# Altium PCB MSM8916_board.PcbDoc (part 2 of 2)
Units mil, origin at the board's own origin, x right, y up, seen from the top; angles counter-clockwise.
Board outline 1181.46 x 1183.49 mil, 2 copper layers (Top Layer, Bottom Layer); 218 components, 226 nets, 1647 pads, 0 vias.
Unrouted connection lines stored in the file: 1143.
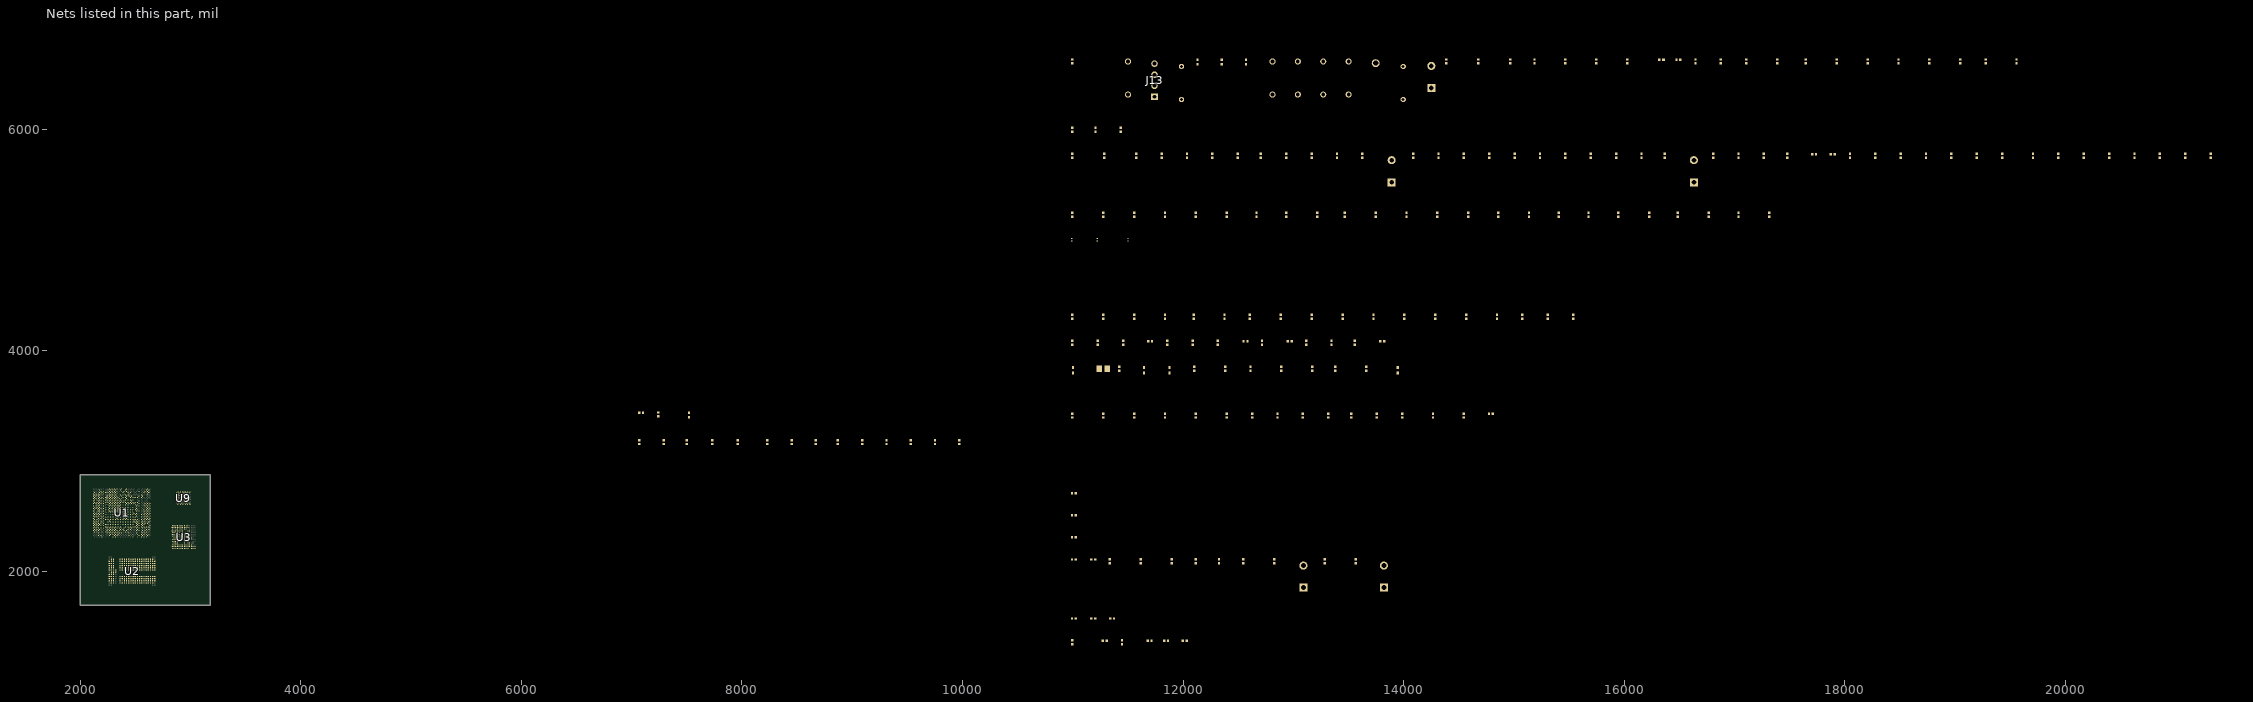
[diagram p2: the nets of this part, all layers, seen from the top]

## Part data
C1 C64: library part CAP, Tolerance="10% 6.3V", VOLT=?V, CDS_LMAN_SYM_OUTLINE=-75,25,75,-25, OriginalSymbolOrigin=(-100,75), PACK_TYPE=?, PART_ID=MFG_NO, PART_NUMBER=MCN_NO, SYMNAME=CAP
C2 C173: library part CAP, Tolerance=5%, VOLT=50V, CDS_LMAN_SYM_OUTLINE=-75,25,75,-25, OriginalSymbolOrigin=(-100,75), PACK_TYPE=?, PART_ID=MFG_NO, PART_NUMBER=MCN_NO, SYMNAME=CAP
C3: "Capacitor", LatestRevisionDate=17-Jul-2002, LatestRevisionNote="Re-released for DXP Platform.", PackageDescription="Radial Cap, Thru-Hole; 2 Leads; 0.3 in Pin Spacing", PackageReference=RAD-0.3, Published=8-Jun-2000, Publisher="Altium Limited"
C4 C5 C10 C11 C12 C13 C14 C15 C16 C17 C19 C20 C21 C22 C119: library part CAP#1, Tolerance="10% 6.3V", VOLT=?V, CDS_LMAN_SYM_OUTLINE=-25,50,25,-50, OriginalSymbolOrigin=(-75,50), PACK_TYPE=?, PART_ID=MFG_NO, PART_NUMBER=MCN_NO, SYMNAME=CAP
C7 C9 C23 C24 C25 C26 C27 C28 C29 C30 C31 C32 C33 C34 C35 C36 C37 C38 C39 C40 C41 C42 C43 C44 C45 C46 C47 C48 C49 C50 C51 C52 C53 C54 C55 C56 C57 C58 C59 C60 C61 C70 C120 C124 C145 C175 C179 C180 C181 C182 C183 C184 C185 C186 C187 C188 C189 C190 C197 C202 C210 C228 C229: library part Cap, "Capacitor", LatestRevisionDate=17-Jul-2002, LatestRevisionNote="Re-released for DXP Platform.", PackageDescription="Radial Cap, Thru-Hole; 2 Leads; 0.3 in Pin Spacing", PackageReference=RAD-0.3, Published=8-Jun-2000, Publisher="Altium Limited"
C18: library part CAP#1, Tolerance="6.3V 10%", VOLT=?V, CDS_LMAN_SYM_OUTLINE=-25,50,25,-50, OriginalSymbolOrigin=(-75,50), PACK_TYPE=?, PART_ID=MFG_NO, PART_NUMBER=MCN_NO, SYMNAME=CAP
C65: library part CAP, Tolerance=10%, VOLT=6.3V, CDS_LMAN_SYM_OUTLINE=-75,25,75,-25, OriginalSymbolOrigin=(-100,75), PACK_TYPE=?, PART_ID=MFG_NO, PART_NUMBER=MCN_NO, SYMNAME=CAP
C66: library part CAP, Tolerance=6.3V, VOLT=10%, CDS_LMAN_SYM_OUTLINE=-75,25,75,-25, OriginalSymbolOrigin=(-100,75), PACK_TYPE=?, PART_ID=MFG_NO, PART_NUMBER=MCN_NO, SYMNAME=CAP
C67: library part CAP#1, Tolerance=6.3V, VOLT=10%, CDS_LMAN_SYM_OUTLINE=-25,50,25,-50, OriginalSymbolOrigin=(-75,50), PACK_TYPE=?, PART_ID=MFG_NO, PART_NUMBER=MCN_NO, SYMNAME=CAP
C69 C71: library part CAP, Tolerance="20% 6.3V", VOLT=?V, CDS_LMAN_SYM_OUTLINE=-75,25,75,-25, OriginalSymbolOrigin=(-100,75), PACK_TYPE=?, PART_ID=MFG_NO, PART_NUMBER=MCN_NO, SYMNAME=CAP
C76 C77 C78 C79 C146 C147 C148 C149 C150 C151 C152 C153 C154 C155: library part CAP#1, Tolerance="20% 6.3V", VOLT=?V, CDS_LMAN_SYM_OUTLINE=-25,50,25,-50, OriginalSymbolOrigin=(-75,50), PACK_TYPE=?, PART_ID=MFG_NO, PART_NUMBER=MCN_NO, SYMNAME=CAP
C80: library part CAP, Tolerance=50V, VOLT=5%, CDS_LMAN_SYM_OUTLINE=-75,25,75,-25, OriginalSymbolOrigin=(-100,75), PACK_TYPE=?, PART_ID=MFG_NO, PART_NUMBER=MCN_NO, SYMNAME=CAP
C81: library part CAP#1, Tolerance=20%, VOLT=10V, CDS_LMAN_SYM_OUTLINE=-25,50,25,-50, OriginalSymbolOrigin=(-75,50), PACK_TYPE=?, PART_ID=MFG_NO, PART_NUMBER=MCN_NO, SYMNAME=CAP
C82: library part CAP, Tolerance=10%, VOLT=10V, CDS_LMAN_SYM_OUTLINE=-75,25,75,-25, OriginalSymbolOrigin=(-100,75), PACK_TYPE=?, PART_ID=MFG_NO, PART_NUMBER=MCN_NO, SYMNAME=CAP
C83 C84 C85 C86 C92 C93 C94 C95 C156 C157 C158 C159: library part CAP#1, Tolerance="10% 10V", VOLT=?V, CDS_LMAN_SYM_OUTLINE=-25,50,25,-50, OriginalSymbolOrigin=(-75,50), PACK_TYPE=?, PART_ID=MFG_NO, PART_NUMBER=MCN_NO, SYMNAME=CAP
C89: library part CAP#1, Tolerance=10%, VOLT=10V, CDS_LMAN_SYM_OUTLINE=-25,50,25,-50, OriginalSymbolOrigin=(-75,50), PACK_TYPE=?, PART_ID=MFG_NO, PART_NUMBER=MCN_NO, SYMNAME=CAP
C90 C91: library part CAP#1, Tolerance="20% 3.6V", VOLT=?V, CDS_LMAN_SYM_OUTLINE=-25,50,25,-50, OriginalSymbolOrigin=(-75,50), PACK_TYPE=?, PART_ID=MFG_NO, PART_NUMBER=MCN_NO, SYMNAME=CAP
C102 C104 C107 C113 C127 C128: library part C0201
C103 C105 C106 C108 C109 C110 C111 C112 C114 C115 C116 C117 C129 C130 C131 C132 C133 C134: library part C0402
CR24: library part SCHOTTKY, CDS_LMAN_SYM_OUTLINE=-50,75,50,-75, OriginalSymbolOrigin=(-100,100), PACK_TYPE=?, PART_ID=MFG_NO, PART_NUMBER=MCN_NO, SYMNAME=SCHOTTKY
D1: "发光二极管", LatestRevisionDate=08-Jul-2005, LatestRevisionNote="Mech Layer 1 removed.", PackageReference=LED-0, Published=8-Jun-2000, Publisher="Altium Limited"
E5 L12 L16 L17 L18: library part Inductor, "Inductor", Code_IEC=1005, Code_JEITA=0402, LatestRevisionDate=29-May-2009, LatestRevisionNote="IPC-7351 Footprint Added.", PackageDescription="Chip Inductor", PackageReference=0402-A, Published=8-Jun-2000, Publisher="Altium Limited"
E10: library part TP
J13: library part "Header 4", "Header, 4-Pin", LatestRevisionDate=17-Jul-2002, LatestRevisionNote="Re-released for DXP Platform.", Publisher="Altium Limited"
JP1 JP2 S6A S6B: "Switch", LatestRevisionDate=17-Jul-2002, LatestRevisionNote="Re-released for DXP Platform.", PackageDescription="Switch; 2 Leads", PackageReference=SPST-2, Published=24-Mar-1999, Publisher="Altium Limited"
L1 L2 L3 L4: library part INDUCTOR_0
R1 R2 R3 R6 R9 R16 R17 R18 R19 R20 R21 R25 R45 R48 R93 R94 R95 R96 R97 R105 R127 R128 R129 R132 R133 R134 R135 R137 R158 R166: library part Res1, "Resistor", LatestRevisionDate=17-Jul-2002, LatestRevisionNote="Re-released for DXP Platform.", PackageDescription="Axial Device, Thru-Hole; 2 Leads; 0.3 in Pin Spacing", PackageReference=AXIAL-0.3, Published=8-Jun-2000, Publisher="Altium Limited"
R4 R5 R7 R8 R28 R80: library part RESISTOR_Dup3, POWER=0.05W, Tolerance=1%, CDS_LMAN_SYM_OUTLINE=-150,50,150,-50, OriginalSymbolOrigin=(-200,50), PACK_TYPE=?, PART_ID=MFG_NO, PART_NUMBER=MCN_NO, SYMNAME=resistor
R10: "贴片电阻", LatestRevisionDate=17-Jul-2002, LatestRevisionNote="Re-released for DXP Platform.", PackageReference=AXIAL-0.4, Published=8-Jun-2000, Publisher="Altium Limited"
R43 R44 R163: library part R0201
R88 R106 R130 R138: library part RESISTOR_Dup3, POWER=0.063W, Tolerance=5%, CDS_LMAN_SYM_OUTLINE=-150,50,150,-50, OriginalSymbolOrigin=(-200,50), PACK_TYPE=?, PART_ID=MFG_NO, PART_NUMBER=MCN_NO, SYMNAME=resistor
R104: library part RESISTOR_Dup3, POWER="5% 0.05W", Tolerance=?%, CDS_LMAN_SYM_OUTLINE=-150,50,150,-50, OriginalSymbolOrigin=(-200,50), PACK_TYPE=?, PART_ID=MFG_NO, PART_NUMBER=MCN_NO, SYMNAME=resistor
S5: library part SW-SPST, "Single-Pole, Single-Throw Switch", LatestRevisionDate=17-Jul-2002, LatestRevisionNote="Re-released for DXP Platform.", PackageDescription="Switch; 2 Leads", PackageReference=SPST-2, Published=24-Mar-1999, Publisher="Altium Limited"
Y1: library part CRYSTAL_4PIN_THERMISTOR_GND, FREQ=19.2MHZ, CDS_LMAN_SYM_OUTLINE=-300,125,300,-500, OriginalSymbolOrigin=(-350,150), PACK_TYPE=?, PART_ID=MFG_NO, PART_NUMBER=MCN_NO, SYMNAME=crystal_4pin_thermistor_gnd
U1: CDS_LMAN_SPLIT_NUMBER="1 of 13", CDS_LMAN_SYM_OUTLINE=-1050,2500,1050,-2500, OriginalSymbolOrigin=(-1100,2500), PACK_TYPE=?, PART_ID=MFG_NO, PART_NUMBER=MCN_NO, SPLIT_INST=TRUE, SYMNAME=NC_DNC
U3: BLOCKID=PROTO, CDS_LMAN_SPLIT_NUMBER="1 of 7", CDS_LMAN_SYM_OUTLINE=-850,1125,875,-1250, OriginalSymbolOrigin=(-1050,1125), PACK_TYPE=?, PART_ID=MFG_NO, PART_NUMBER=MCN_NO, SPLIT_INST=TRUE, SYMNAME=GND
U9: CDS_LMAN_SPLIT_NUMBER="1 of 2", CDS_LMAN_SYM_OUTLINE=-850,1375,875,-1500, OriginalSymbolOrigin=(-1075,1375), PACK_TYPE=?, PART_ID=MFG_NO, PART_NUMBER=MCN_NO, SPLIT_INST=TRUE, SYMNAME=PWR_GND

## Nets (pads, with @x,y where several pads share a name; then routed paths per layer and width w, separated by ;. In a path a pad name is that pad's centre, name@x,y a point inside that pad or via, vN(x,y) a via of type N, cw(c..) or ccw(c..) an arc to the next point about the centre after c; other vN are vias at no path point)
APQ_BBCLK1_EN: U1.A36 U3.E4
APQ_PS_HOLD: R25.1 U1.E36
APQ_RESIN_N: R166.1 U1.F35
APQ_RESOUT_N: U1.AV1 U2.C2
BATT_ID: R129.1 R135.2 U3.G9
BATT_THERM: R134.2 R137.1
BBCLK1: U1.AD35 U1.AL34 U3.F2
BOOT_CONFIG_0: R18.2 U1.BD5
BOOT_CONFIG_1: R128.2 S6B.2 U1.BD7
BOOT_CONFIG_2: R17.2 U1.BC38
BOOT_CONFIG_3: R21.2 U1.BC40
BOOT_CONFIG_5: R132.2 U1.BD39
CBLPWR_N: R104.2 U3.L10
CLK_IN_19M2_PM: U3.J1
DGND: C1.2 C2.2 C3.1 C4.1 C5.1 C7.1 C9.1 C10.1 C11.1 C12.1 C13.1 C14.1 C15.1 C16.1 C17.1 C18.1 C19.1 C20.1 C21.1 C22.1 C23.1 C24.1 C25.1 C26.1 C27.1 C28.1 C29.1 C30.1 C31.1 C32.1 C33.1 C34.1 C35.1 C36.1 C37.1 C38.1 C39.1 C40.1 C41.1 C42.1 C43.1 C44.1 C45.1 C46.1 C47.1 C48.1 C49.1 C50.1 C51.1 C52.1 C53.1 C54.1 C55.1 C56.1 C57.1 C58.1 C59.1 C60.1 C61.1 C64.2 C65.2 C66.2 C67.1 C69.2 C70.1 C71.2 C76.1 C77.1 C78.1 C79.1 C80.2 C81.2 C82.2 C83.1 C84.1 C85.1 C86.1 C89.1 C90.1 C91.1 C92.1 C93.1 C94.1 C95.1 C119.1 C120.1 C124.1 C146.1 C147.1 C148.1 C149.1 C150.1 C151.1 C152.1 C153.1 C154.1 C155.1 C156.1 C157.1 C158.1 C159.1 C173.2 C179.1 C180.1 C181.1 C182.1 C183.1 C184.1 C185.1 C186.1 C187.1 C188.1 C190.1 C197.1 C202.1 C210.1 C228.1 C229.1 CR24.2 D1.2 J13.2 J13.3 J13.4 L16.1 L17.1 L18.1 R1.1 R5.2 R7.2 R43.1 R80.2 R104.1 R105.1 R106.1 R163.1 U1.A6 U1.A12 U1.A16 U1.A22 U1.A28 U1.A32 U1.AA4 U1.AA8 U1.AA24 U1.AA26 U1.AA28 U1.AA30 U1.AB13 U1.AB15 U1.AB17 U1.AB21 U1.AC4 U1.AC30 U1.AD7 U1.AD19 U1.AD21 U1.AE16 U1.AE20 U1.AF5 U1.AF9 U1.AF11 U1.AF13 U1.AF15 U1.AF17 U1.AF19 U1.AF21 U1.AF23 U1.AF25 U1.AF27 U1.AF29 U1.AG18 U1.AG20 U1.AH7 U1.AH9 U1.AH31 U1.AJ2 U1.AJ4 U1.AJ34 U1.AK7 U1.AK11 U1.AK13 U1.AK15 U1.AK17 U1.AK19 U1.AK21 U1.AK23 U1.AK29 U1.AK31 U1.AK33 U1.AL8 U1.AL30 U1.AM1 U1.AM3 U1.AM13 U1.AM15 U1.AM21 U1.AM23 U1.AM25 U1.AM29 U1.AM31 U1.AM33 U1.AN20 U1.AP9 U1.AR4 U1.AR6 U1.AR8 U1.AR22 U1.AR24 U1.AR26 U1.AT1 U1.AT3 U1.AT13 U1.AT23 U1.AT27 U1.AT29 U1.AU2 U1.AU6 U1.AU12 U1.AU22 U1.AU26 U1.AU28 U1.AU38 U1.AV5 U1.AV9 U1.AV11 U1.AV13 U1.AV15 U1.AV17 U1.AV19 U1.AV33 U1.AW2 U1.AW4 U1.AW10 U1.AW12 U1.AW14 U1.AW34 U1.AY11 U1.AY13 U1.AY15 U1.AY17 U1.AY19 U1.AY21 U1.AY23 U1.AY27 U1.B5 U1.BA8 U1.BA12 U1.BA14 U1.BA16 U1.BA18 U1.BA20 U1.BA22 U1.BA26 U1.BA28 U1.BB7 U1.BB9 U1.BB15 U1.BB17 U1.BB19 U1.BB21 U1.BB23 U1.BB25 U1.BB27 U1.BC12 U1.BC16 U1.BC18 U1.BC20 U1.BC22 U1.BC24 U1.BC26 U1.BC28 U1.BC36 U1.BD9 U1.BD13 U1.BD15 U1.BD17 U1.BD19 U1.BD21 U1.BD23 U1.BD25 U1.BD27 U1.BD37 U1.BE8 U1.BE10 U1.BE14 U1.BE16 U1.BE18 U1.BE20 U1.BE22 U1.BE24 U1.BE26 U1.BE28 U1.C8 U1.C18 U1.C20 U1.C32 U1.D5 U1.D7 U1.D27 U1.E12 U1.F7 U1.F19 U1.F21 U1.F25 U1.F27 U1.F29 U1.F37 U1.G8 U1.G10 U1.G12 U1.G14 U1.G16 U1.G18 U1.G20 U1.G24 U1.G28 U1.G30 U1.G32 U1.H35 U1.H37 U1.J16 U1.J18 U1.J32 U1.J36 U1.J38 U1.K5 U1.K9 U1.K17 U1.K21 U1.K37 U1.L4 U1.L6 U1.L8 U1.L30 U1.L32 U1.M5 U1.M7 U1.M35 U1.M37 U1.M39 U1.N2 U1.N4 U1.N8 U1.N22 U1.N24 U1.N26 U1.N28 U1.N30 U1.N32 U1.N34 U1.N36 U1.N38 U1.N40 U1.P5 U1.P9 U1.P11 U1.P13 U1.P15 U1.P17 U1.P21 U1.P35 U1.P37 U1.P39 U1.R8 U1.R22 U1.R24 U1.R26 U1.R28 U1.R30 U1.R32 U1.R34 U1.R36 U1.R38 U1.R40 U1.T3 U1.T5 U1.T17 U1.T19 U1.T35 U1.T37 U1.T39 U1.U26 U1.U28 U1.U30 U1.U32 U1.U34 U1.U36 U1.U38 U1.U40 U1.V3 U1.V11 U1.V13 U1.V15 U1.V17 U1.V19 U1.V21 U1.V23 U1.V35 U1.V37 U1.V39 U1.W4 U1.W16 U1.W22 U1.W26 U1.W28 U1.W30 U1.W32 U1.W34 U1.W36 U1.W38 U1.W40 U1.Y3 U1.Y23 U3.A4 U3.A9 U3.B4 U3.B9 U3.C4 U3.C9 U3.D2 U3.D6 U3.D7 U3.D10 U3.D11 U3.E7 U3.E9 U3.G4 U3.G7 U3.G8 U3.G10 U3.H3 U3.H7 U3.H8 U3.H10 U3.H11 U3.H12 U3.J2 U3.J3 U3.J6 U3.K5 U3.K9 U3.L13 U3.N3 U3.N8 U3.N10 U3.P3 U3.P8 U9.1 U9.2 U9.8 U9.10 U9.12 U9.14 U9.17 U9.19 U9.20 U9.21 U9.25 U9.27 U9.32 U9.34 U9.35 U9.39 U9.42 U9.44 U9.45 Y1.2
EBI_CA0: U1.E10 U2.Y2
EBI_CA1: U1.E8 U2.Y3
EBI_CA2: U1.C6 U2.W2
EBI_CA3: U1.D9 U2.W3
EBI_CA4: U1.E6 U2.V3
EBI_CA5: U1.B13 U2.L3
EBI_CA6: U1.C12 U2.K3
EBI_CA7: U1.D13 U2.J3
EBI_CA8: U1.B11 U2.J2
EBI_CA9: U1.E14 U2.H2
EBI_CAL: R4.1 U1.F11
EBI_CK: U1.C10 U2.P3
EBI_CKB: U1.D11 U2.N3
EBI_CKE_0: U1.A8 U2.T2
EBI_CKE_1: U1.A10 U2.R2
EBI_CS0_N: U1.B7 U2.U3
EBI_CS1_N: U1.B9 U2.T3
EBI_DM0: U1.F23 U2.R10
EBI_DM1: U1.E24 U2.N10
EBI_DM2: U1.B19 U2.W10
EBI_DM3: U1.B31 U2.J10
EBI_DQ0: U1.E20 U2.W12
EBI_DQ1: U1.E22 U2.V11
EBI_DQ2: U1.A20 U2.V13
EBI_DQ3: U1.D21 U2.U11
EBI_DQ4: U1.B21 U2.U13
EBI_DQ5: U1.D23 U2.T11
EBI_DQ6: U1.B23 U2.T13
EBI_DQ7: U1.A24 U2.R12
EBI_DQ8: U1.E28 U2.N12
EBI_DQ9: U1.C26 U2.M13
EBI_DQ10: U1.A26 U2.M11
EBI_DQ11: U1.B29 U2.L13
EBI_DQ12: U1.D29 U2.L11
EBI_DQ13: U1.C28 U2.K11
EBI_DQ14: U1.A30 U2.K13
EBI_DQ15: U1.E30 U2.J12
EBI_DQ16: U1.B17 U2.AB12
EBI_DQ17: U1.B15 U2.AB11
EBI_DQ18: U1.A14 U2.AB10
EBI_DQ19: U1.A18 U2.AA13
EBI_DQ20: U1.D15 U2.AA12
EBI_DQ21: U1.C14 U2.AA10
EBI_DQ22: U1.D17 U2.Y13
EBI_DQ23: U1.E16 U2.Y11
EBI_DQ24: U1.C34 U2.H11
EBI_DQ25: U1.F33 U2.H13
EBI_DQ26: U1.C36 U2.G10
EBI_DQ27: U1.D35 U2.G12
EBI_DQ28: U1.E34 U2.G13
EBI_DQ29: U1.B35 U2.F10
EBI_DQ30: U1.A34 U2.F11
EBI_DQ31: U1.B33 U2.F12
EBI_DQS0_C: U1.B25 U2.R9
EBI_DQS0_T: U1.C24 U2.T9
EBI_DQS1_C: U1.D25 U2.N9
EBI_DQS1_T: U1.E26 U2.M9
EBI_DQS2_C: U1.D19 U2.W9
EBI_DQS2_T: U1.E18 U2.Y9
EBI_DQS3_C: U1.D31 U2.J9
EBI_DQS3_T: U1.E32 U2.H9
EBIO_VREF: C1.1 C65.1 C102.1 U1.H21 U1.J12 U1.J26 U2.M2 U2.P13 U3.A2
EMMC_VDDI: C104.1 U2.A11
FORCED_USB_BOOT: R127.2 S6A.2 U1.E4
GND: C102.2 C103.2 C104.2 C105.2 C106.2 C107.2 C108.2 C109.2 C110.2 C111.2 C112.2 C113.2 C114.2 C115.2 C116.2 C117.2 C127.2 C128.2 C129.2 C130.2 C131.2 C132.2 C133.2 C134.2 C145.1 R4.2 R5.1 R7.1 R8.2 R134.1 R135.1 U2.A3 U2.A8 U2.A12 U2.AA2 U2.AA4 U2.AA8 U2.AA11 U2.B2 U2.B7 U2.B11 U2.C3 U2.C5 U2.C8 U2.C10 U2.C12 U2.C13 U2.D7 U2.F2 U2.F13 U2.G4 U2.G8 U2.G11 U2.H3 U2.H4 U2.H5 U2.H10 U2.J4 U2.J8 U2.J13 U2.K4 U2.K8 U2.K9 U2.L4 U2.L10 U2.L12 U2.M3 U2.M4 U2.M8 U2.N4 U2.N8 U2.N13 U2.P2 U2.P4 U2.P9 U2.P12 U2.R3 U2.R4 U2.R8 U2.R13 U2.T4 U2.T8 U2.U4 U2.U10 U2.U12 U2.V4 U2.V8 U2.V9 U2.W4 U2.W8 U2.W13 U2.Y4 U2.Y5 U2.Y10
I2C0_SCL: R9.2 U1.AV3
I2C0_SDA: R6.2 U1.AY3
KEY_VOLP_N: U1.H33
MIPI_CSI0_CLK_M: U1.W6
MIPI_CSI0_CLK_P: U1.V5
MIPI_CSI0_DATA0_M: CN0.1 U1.U4
MIPI_CSI0_DATA0_P: CN0.2 U1.U6
MIPI_CSI0_DATA1_M: U1.U2
MIPI_CSI0_DATA1_P: U1.T1
MIPI_CSI0_DATA2_M: U1.W2
MIPI_CSI0_DATA2_P: U1.V1
MIPI_CSI0_DATA3_M: U1.AA6
MIPI_CSI0_DATA3_P: U1.Y5
MIPI_DSI_DCDC: C145.2 L12.1 U1.AG6
NetC3_2: C3.2 C175.2 R93.1
NetC82_1: C82.1 R138.2 U3.N12 U3.P12
NetC89_2: C89.2 R88.2 R130.2 U3.M12
NetC95_2: C95.2 U3.M9 U3.M10
NetC107_1: C107.1 C128.1 U2.A4 U2.B6 U2.B9 U2.C7 U2.C11
NetC149_2: C149.2 U3.D4
NetC152_2: C152.2 U3.G2
NetC155_2: C155.2 U3.A1
NetC159_2: C159.2 U3.A3
NetC189_1: C189.1 U9.30
NetD1_1: D1.1 R10.2
NetE10_1: E10.1 R95.2
NetFL1_1: L17.2 R93.2
NetFL1_4: L16.2 R16.1 R96.1
NetJ13_1: J13.1 R16.2
NetL12_2: L12.2 U1.AB7
NetL18_2: L18.2 R94.2 R95.1
NetR1_2: R1.2 U1.AU14
NetR2_1: R2.1 U1.AE36
NetR3_1: R3.1 U1.R4
NetR8_1: R8.1 U1.H13
NetR10_1: R10.1 U3.K4
NetR19_2: R19.2 R127.1 S6A.1
NetR20_2: R20.2 R128.1 S6B.1
NetR25_2: R25.2 U3.G5
NetR80_1: R80.1 U1.AC38
NetR94_1: R94.1 S5.2
NetR96_2: R96.2 S5.1
NetR158_1: R158.1 U1.G38
NetR166_2: R166.2 U3.F5
ODT: R163.2 U2.P10
PHONE_ON_N: U3.K10
PM_BBATT_THERM: R133.1 R137.2 U3.M11
PM_OPT1: R106.2 U3.D5
PM_RESIN_N: U3.C3
PM_XO_THERM: C80.1 R28.2 U3.K2
PRE_BUCK_OUT: R88.1
REF_BYP: C64.1 U3.D1
RFCLK2: C189.2 U3.L2
SD_CARD_DET_N: CR24.1 R48.1 U1.B37 U15.1
SDC1_CLK: R2.2 U2.B8
SDC1_CMD: R44.1 U1.AH35 U2.A6
SDC1_DATA_0: U1.AD37 U2.A9
SDC1_DATA_1: U1.AE38 U2.B10
SDC1_DATA_2: U1.AG34 U2.C6
SDC1_DATA_3: U1.AH37 U2.B5
SDC1_DATA_4: U1.AG40 U2.C9
SDC1_DATA_5: U1.AG38 U2.A10
SDC1_DATA_6: U1.AF39 U2.A5
SDC1_DATA_7: U1.AF35 U2.B4
SDC2_CLK: R3.2 R45.1
SDC2_CMD: U1.N6
SDC2_DATA_0: U1.P3
SDC2_DATA_1: U1.R6 U15.2
SDC2_DATA_2: J5.1 U1.T7
SDC2_DATA_3: J5.2 U1.P7
SLEEP_CLK: U1.G36 U3.G6
SPI1_CLK: U1.E2
SPI1_CS_N: U1.H1
SPI1_MISO: U1.G2
SPI1_MOSI: U1.H5
SPMI_CLK: C173.1 U1.AK37 U3.A10
SPMI_DATA: C2.1 U1.AJ36 U3.B10
UART0_CTS_N: U1.AV35
UART0_RTS_N: U1.AY37
UART0_RX: CN1.2 U1.BB39
UART0_TX: CN1.1 U1.BA38
UART1_RX: U1.AY1
UART1_TX: U1.AT9
USB_HS_D_M: U1.AC40
USB_HS_D_P: U1.AB39
USB_HS_ID: R158.2
USB_HUB_RESET_N_PM: U3.N11
USB_SW_SEL_PM: U3.L8
USB_VBUS_IN: C197.2 R105.2 U3.N13 U3.P13
USR_LED_1_CTRL: CN2.1 U1.AW6
USR_LED_2_CTRL: CN2.2 U1.F39
USR_LED_3_CTRL: U3.J7
USR_LED_4_CTRL: U3.H6
VBATT_CONN: C83.2 C84.2 C85.2 C86.2 C90.2 C91.2 R130.1 R138.1 U3.A6 U3.A7 U3.B1 U3.B2 U3.B6 U3.B7 U3.C6 U3.C7 U3.E1 U3.E2 U3.M5 U3.M6 U3.N5 U3.N6 U3.P5 U3.P6
VCOIN: C81.1 U3.L11
VDD1_L5_1P8: C106.1 C112.1 C114.1 C116.1 U2.AA3 U2.AA5 U2.AB3 U2.AB4 U2.AB9 U2.F3 U2.F4 U2.F9 U2.G5
VDD2_L2_1P2: C103.1 C105.1 C108.1 C109.1 C110.1 C111.1 C115.1 C117.1 C129.1 C130.1 C131.1 C132.1 C133.1 C134.1 U2.AA9 U2.AB5 U2.AB8 U2.F5 U2.F8 U2.G9 U2.H8 U2.H12 U2.J5 U2.J11 U2.K2 U2.K5 U2.K10 U2.K12 U2.L2 U2.L5 U2.L8 U2.L9 U2.M5 U2.M10 U2.M12 U2.N2 U2.N5 U2.N11 U2.P5 U2.P8 U2.P11 U2.R5 U2.R11 U2.T5 U2.T10 U2.T12 U2.U2 U2.U5 U2.U8 U2.U9 U2.V2 U2.V5 U2.V10 U2.V12 U2.W5 U2.W11 U2.Y8 U2.Y12
VDD_BT_TXDA_3P3: R97.2 U9.4
VDD_DIG_1P2: C202.2 U9.29
VDD_PX_BIAS: C4.2 C70.2 U1.V9 U1.Y33 U3.L4
VDD_WL_PLL_LO_1P3: C183.2 C188.2 E5.2 U9.36 U9.58
VFB_S1: JP1.1 U3.E5
VPRE_BYP: C67.2 U3.P14
VREF_BATT_THERM: R129.2 R133.2 U3.N14
VREG_L1_1P225: C93.2 U3.P2
VREG_L2_1P2: C10.2 C18.2 C29.2 C36.2 C41.2 C56.2 C92.2 U1.AB9 U1.AC8 U1.AE6 U1.AE8 U1.J10 U1.J14 U1.J20 U1.J22 U1.J24 U1.J30 U1.K11 U1.K15 U1.K19 U1.K23 U3.M1
VREG_L3_1P15: C15.2 C17.2 C19.2 C24.2 C25.2 C27.2 C31.2 C43.2 C45.2 C48.2 C50.2 C94.2 C210.2 U1.AD11 U1.AE22 U1.AE30 U1.AG16 U1.AG28 U1.AH13 U1.AH15 U1.AH23 U1.AH25 U1.AH27 U1.AH29 U1.AJ28 U1.AL28 U1.AM9 U1.AM11 U1.AN28 U1.AP27 U1.AP29 U1.AU10 U1.J28 U1.K25 U1.K27 U1.M13 U1.M15 U1.M17 U1.N14 U1.T13 U1.T15 U1.T23 U1.T31 U1.Y19 U1.Y21 U3.P1
VREG_L5_1P8: C7.2 C9.2 C28.2 C30.2 C35.2 C42.2 C44.2 C46.2 C146.2 C179.2 R6.1 R9.1 R17.1 R18.1 R19.1 R20.1 R21.1 R44.2 R48.2 R132.1 U1.AA32 U1.AB35 U1.AC34 U1.AF33 U1.AG32 U1.AK9 U1.AP33 U1.AT7 U1.AT11 U1.AT33 U1.AU8 U1.AU30 U1.AU34 U1.F31 U1.H17 U1.J8 U1.L34 U1.V7 U3.P10 U9.22
VREG_L6_1P8: C14.2 C66.1 C147.2 R28.1 U1.AH5 U1.AJ8 U3.M8
VREG_L7_1P8: C11.2 C16.2 C20.2 C22.2 C119.2 C148.2 C180.2 U1.AD33 U1.AN14 U1.AP23 U1.AR18 U1.AR20 U1.W24 U3.L3 U9.24
VREG_L8_2P9: C113.1 C127.1 C156.2 U2.B3 U2.B12 U2.B13 U2.C4 U2.D8 U3.F1
VREG_L9_3P3: C157.2 C182.2 R97.1 U3.C1 U9.11
VREG_L11_SDC: C120.2 C124.2 C158.2 U3.G3
VREG_L12_SDC: C5.2 C150.2 R45.2 U1.W8 U3.B3
VREG_L13_3P075: C13.2 C151.2 U1.AC32 U3.D3
VREG_L15_1P8: C153.2 U3.G1
VREG_L16_1P8: C154.2 U3.E3
VREG_RF_CLK: C69.1 U3.K3
VREG_S1_1P15: C23.2 C32.2 C33.2 C34.2 C38.2 C39.2 C40.2 C49.2 C52.2 C59.2 C61.2 JP1.2 L1.2 U1.AD13 U1.AD15 U1.AD17 U1.AD25 U1.AD29 U1.AF31 U1.AH11 U1.AH17 U1.AH19 U1.AH21 U1.AM17 U1.AM19 U1.AR10 U1.M9 U1.M11 U1.M21 U1.T9 U1.T11 U1.T21 U1.U8 U1.U22 U1.U24 U1.Y9 U1.Y11 U1.Y13 U1.Y15 U1.Y17
VREG_S2_1P15: C26.2 C37.2 C47.2 C51.2 C53.2 C54.2 C55.2 C57.2 C58.2 C60.2 C228.2 C229.2 JP2.2 L2.2
VREG_S2_S5_1P15: U1.AB25 U1.AB27 U1.AB29 U1.AB31 U1.K29 U1.K31 U1.K33 U1.M23 U1.M25 U1.M27 U1.M29 U1.M31 U1.M33 U1.P27 U1.P29 U1.P31 U1.P33 U1.T25 U1.T27 U1.T29 U1.T33 U1.V25 U1.V27 U1.V29 U1.V31 U1.V33 U1.Y25 U1.Y27 U1.Y29 U1.Y31
VREG_S2_VSENSE: JP2.1 U3.F7
VREG_S3: C12.2 C21.2 C76.2 C78.2 C181.2 C184.2 C185.2 C186.2 C187.2 C190.2 E5.1 L3.2 U1.AP17 U1.AP19 U1.AT15 U3.J8 U3.N1 U3.N2 U9.3 U9.7 U9.9 U9.13 U9.16 U9.23 U9.37 U9.43 U9.51 U9.52 U9.56 U9.57 U9.60
VREG_S4: C77.2 C79.2 L4.2 U3.K8 U3.M2 U3.M3 U3.N9 U3.P9
VREG_XO: C71.1 U3.K1
VSW_S1: L1.1 U3.A5 U3.B5 U3.C5
VSW_S2: L2.1 U3.A8 U3.B8 U3.C8
VSW_S3: L3.1 U3.M4 U3.N4 U3.P4
VSW_S4: L4.1 U3.M7 U3.N7 U3.P7
WCSS_BT_DAT_CTL: U1.BA4 U9.18
WCSS_BT_DAT_STB: U1.AW8 U9.28
WCSS_BT_SSBI: U1.BC2 U9.33
WCSS_FM_SDI: U1.AY9 U9.46
WCSS_FM_SSBI: U1.AY5 U9.41
WCSS_WLAN_CLK: U1.BB3 U9.61
WCSS_WLAN_DATA_0: U1.BD3 U9.48
WCSS_WLAN_DATA_1: U1.BB1 U9.26
WCSS_WLAN_DATA_2: U1.BB5 U9.55
WCSS_WLAN_SET: U1.BA6 U9.6
WL_BT_RFIO: C175.1 U9.5
WLAN_BB_I_M: U1.AR14 U9.59
WLAN_BB_I_P: U1.AP15 U9.54
WLAN_BB_Q_M: U1.AP13 U9.47
WLAN_BB_Q_P: U1.AR12 U9.53
XTAL_19M2_OUT: U3.H2 Y1.1
ZQ0: R43.2 U2.G2
pads on no net: U1.A2 U1.A4 U1.A38 U1.A40 U1.AA2 U1.AA34 U1.AA36 U1.AA38 U1.AA40 U1.AB1 U1.AB3 U1.AB5 U1.AB11 U1.AB19 U1.AB23 U1.AC2 U1.AC6 U1.AD1 U1.AD3 U1.AD5 U1.AD23 U1.AD27 U1.AD31 U1.AE2 U1.AE4 U1.AF1 U1.AF3 U1.AG2 U1.AG4 U1.AH1 U1.AH3 U1.AH39 U1.AJ6 U1.AJ38 U1.AJ40 U1.AK1 U1.AK3 U1.AK5 U1.AK25 U1.AK27 U1.AK35 U1.AK39 U1.AL2 U1.AL4 U1.AL6 U1.AL38 U1.AL40 U1.AM5 U1.AM7 U1.AM27 U1.AM35 U1.AM39 U1.AN2 U1.AN4 U1.AN6 U1.AN8 U1.AN36 U1.AN38 U1.AN40 U1.AP3 U1.AP5 U1.AP7 U1.AP25 U1.AP35 U1.AP37 U1.AR36 U1.AR38 U1.AT5 U1.AT17 U1.AT19 U1.AT21 U1.AT25 U1.AT31 U1.AT35 U1.AT39 U1.AU4 U1.AU16 U1.AU18 U1.AU20 U1.AU24 U1.AU32 U1.AU36 U1.AU40 U1.AV7 U1.AV21 U1.AV23 U1.AV25 U1.AV27 U1.AV29 U1.AV31 U1.AV37 U1.AV39 U1.AW16 U1.AW18 U1.AW20 U1.AW22 U1.AW24 U1.AW26 U1.AW28 U1.AW30 U1.AW32 U1.AW36 U1.AW38 U1.AW40 U1.AY7 U1.AY25 U1.AY29 U1.AY33 U1.AY35 U1.AY39 U1.B1 U1.B3 U1.B39 U1.BA2 U1.BA24 U1.BA30 U1.BA32 U1.BA36 U1.BA40 U1.BB13 U1.BB29 U1.BB31 U1.BB33 U1.BB35 U1.BB37 U1.BC4 U1.BC6 U1.BC8 U1.BC14 U1.BC30 U1.BC32 U1.BC34 U1.BD1 U1.BD11 U1.BD29 U1.BD33 U1.BD35 U1.BE2 U1.BE4 U1.BE6 U1.BE12 U1.BE32 U1.BE34 U1.BE36 U1.BE38 U1.BE40 U1.C2 U1.C4 U1.C38 U1.C40 U1.D1 U1.D3 U1.D33 U1.D37 U1.D39 U1.E38 U1.E40 U1.F1 U1.F3 U1.F5 U1.F15 U1.F17 U1.G4 U1.G6 U1.G22 U1.G26 U1.G34 U1.G40 U1.H3 U1.H7 U1.H11 U1.H15 U1.H19 U1.H23 U1.H25 U1.H27 U1.H29 U1.H31 U1.H39 U1.J2 U1.J4 U1.J6 U1.J34 U1.J40 U1.K1 U1.K3 U1.K7 U1.K35 U1.K39 U1.L2 U1.L36 U1.L38 U1.L40 U1.M1 U1.M3 U1.M19 U1.P19 U1.P23 U1.P25 U1.Y1 U1.Y35 U1.Y37 U1.Y39 U2.A1 U2.A2 U2.A7 U2.A13 U2.A14 U2.AA1 U2.AA14 U2.AB1 U2.AB2 U2.AB13 U2.AB14 U2.B1 U2.B14 U2.D2 U2.D3 U2.D4 U2.D5 U2.D6 U2.G3 U3.A11 U3.A12 U3.A13 U3.A14 U3.B11 U3.B12 U3.B13 U3.B14 U3.C2 U3.C11 U3.C12 U3.C13 U3.C14 U3.D12 U3.D13 U3.D14 U3.E8 U3.E10 U3.E11 U3.E12 U3.E13 U3.E14 U3.F3 U3.F8 U3.F9 U3.F10 U3.F11 U3.F12 U3.F13 U3.F14 U3.G11 U3.G12 U3.G13 U3.G14 U3.H5 U3.H13 U3.J4 U3.J5 U3.J10 U3.J11 U3.J12 U3.J13 U3.J14 U3.K11 U3.K13 U3.K14 U3.L1 U3.L12 U3.M13 U3.M14 U9.15 U9.31 U9.38 U9.40 U9.49 U9.50

## Keep-outs
Keep-Out Layer:
  lines w10: 2000,2871.1 2000,1690 3181.1,1690 ; 2000.35,2873.49 3181.46,2873.49 3181.46,1692.38